# Altium PCB PCB_2020-03-10-03-30-57_2025-10-18.pcbdoc
Units mm, origin at the board's own origin, x right, y up, seen from the top; angles counter-clockwise.
Board outline 87.12 x 86.61 mm, 2 copper layers (Top Layer, Bottom Layer); 17 components, 30 nets, 115 pads, 0 vias.
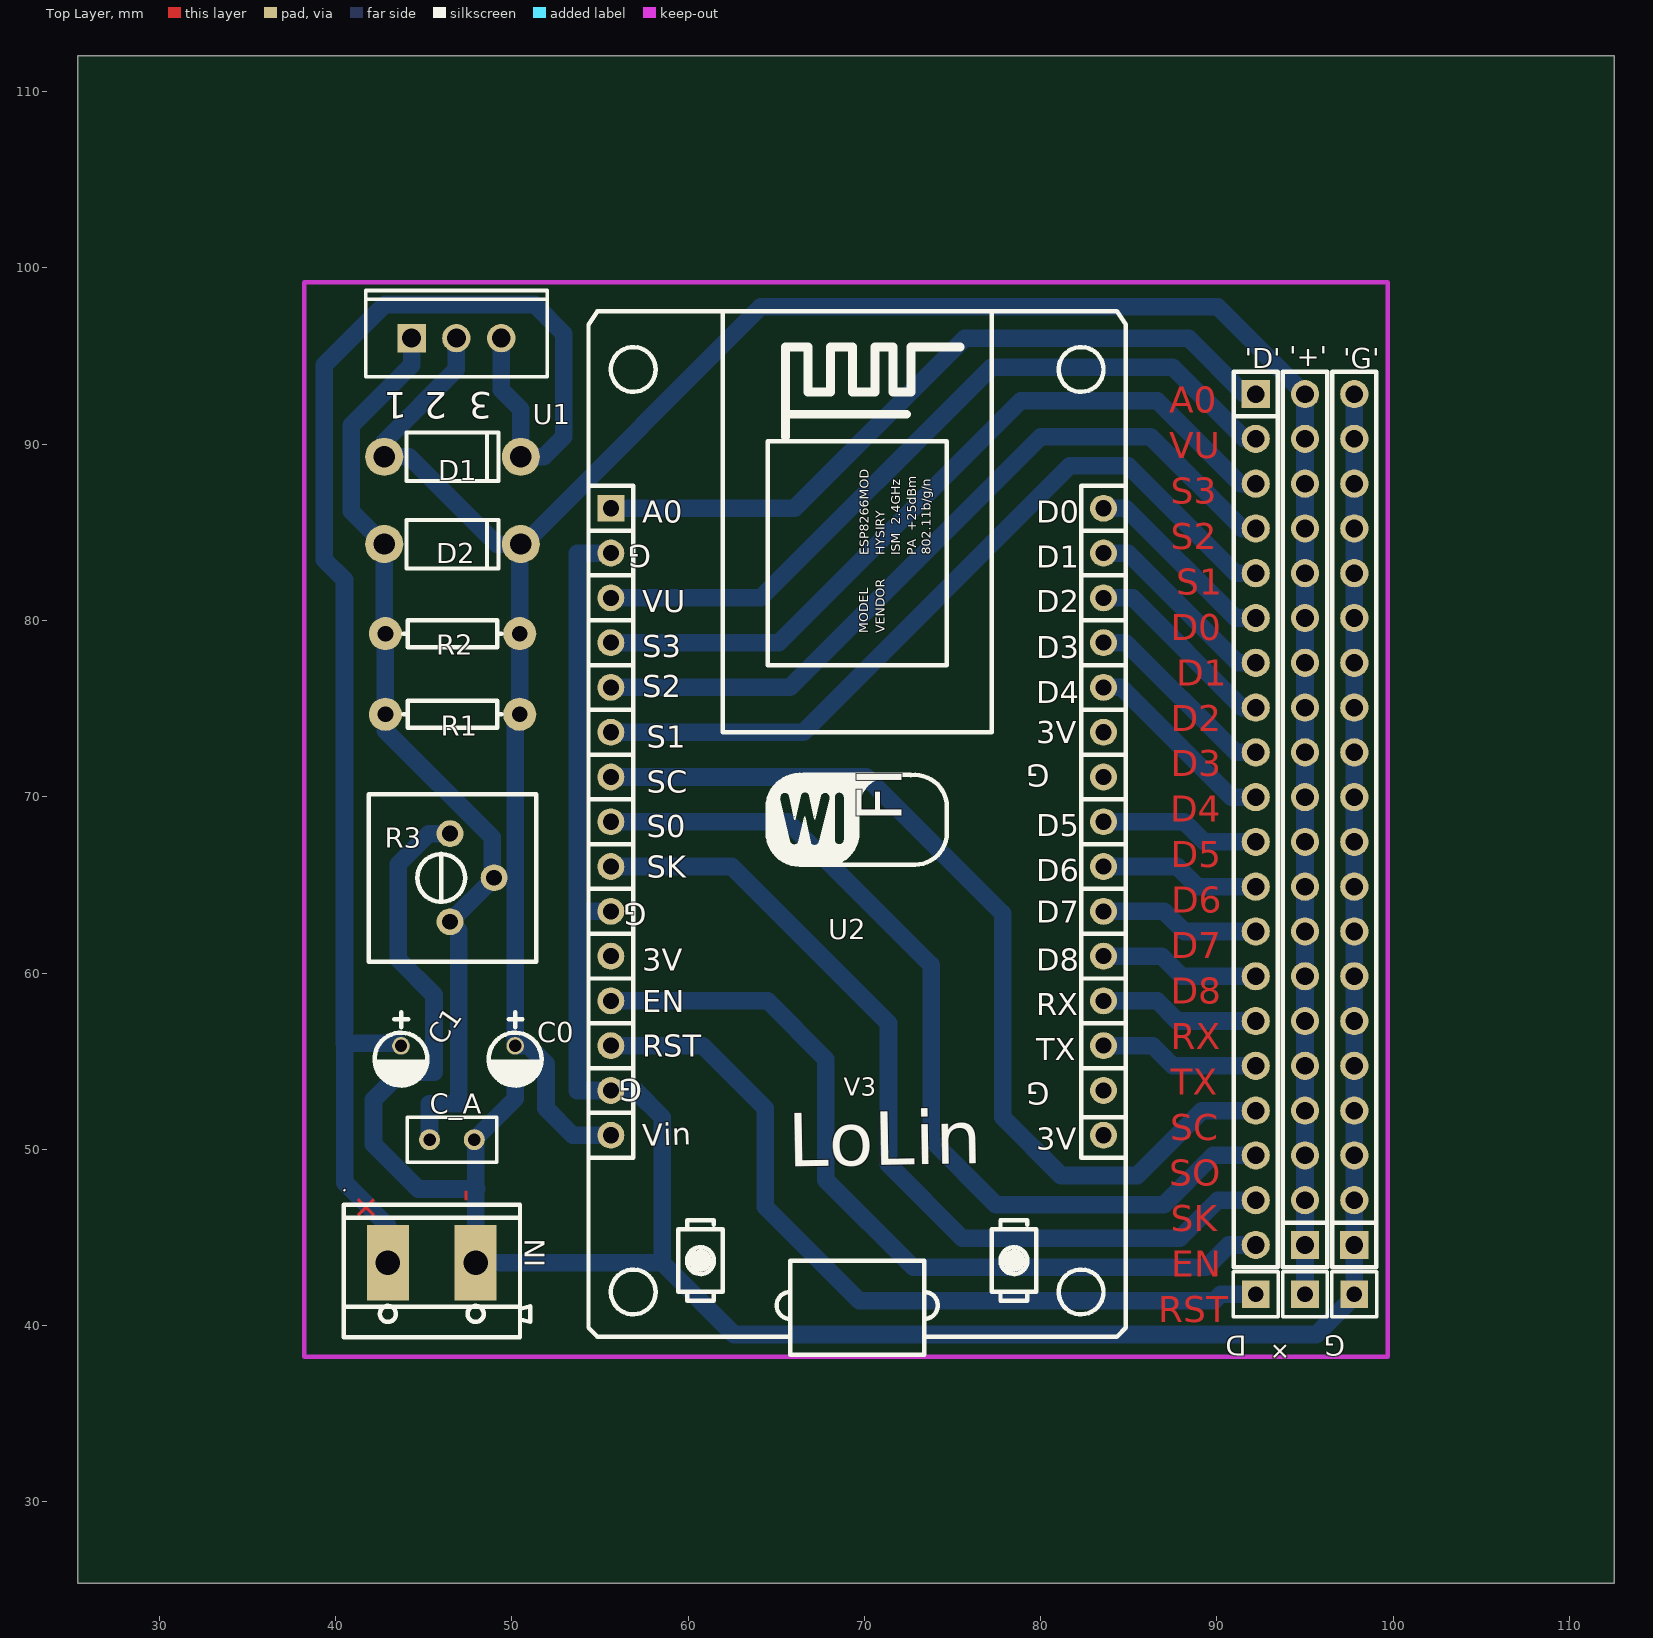
[diagram p0: Top Layer view]
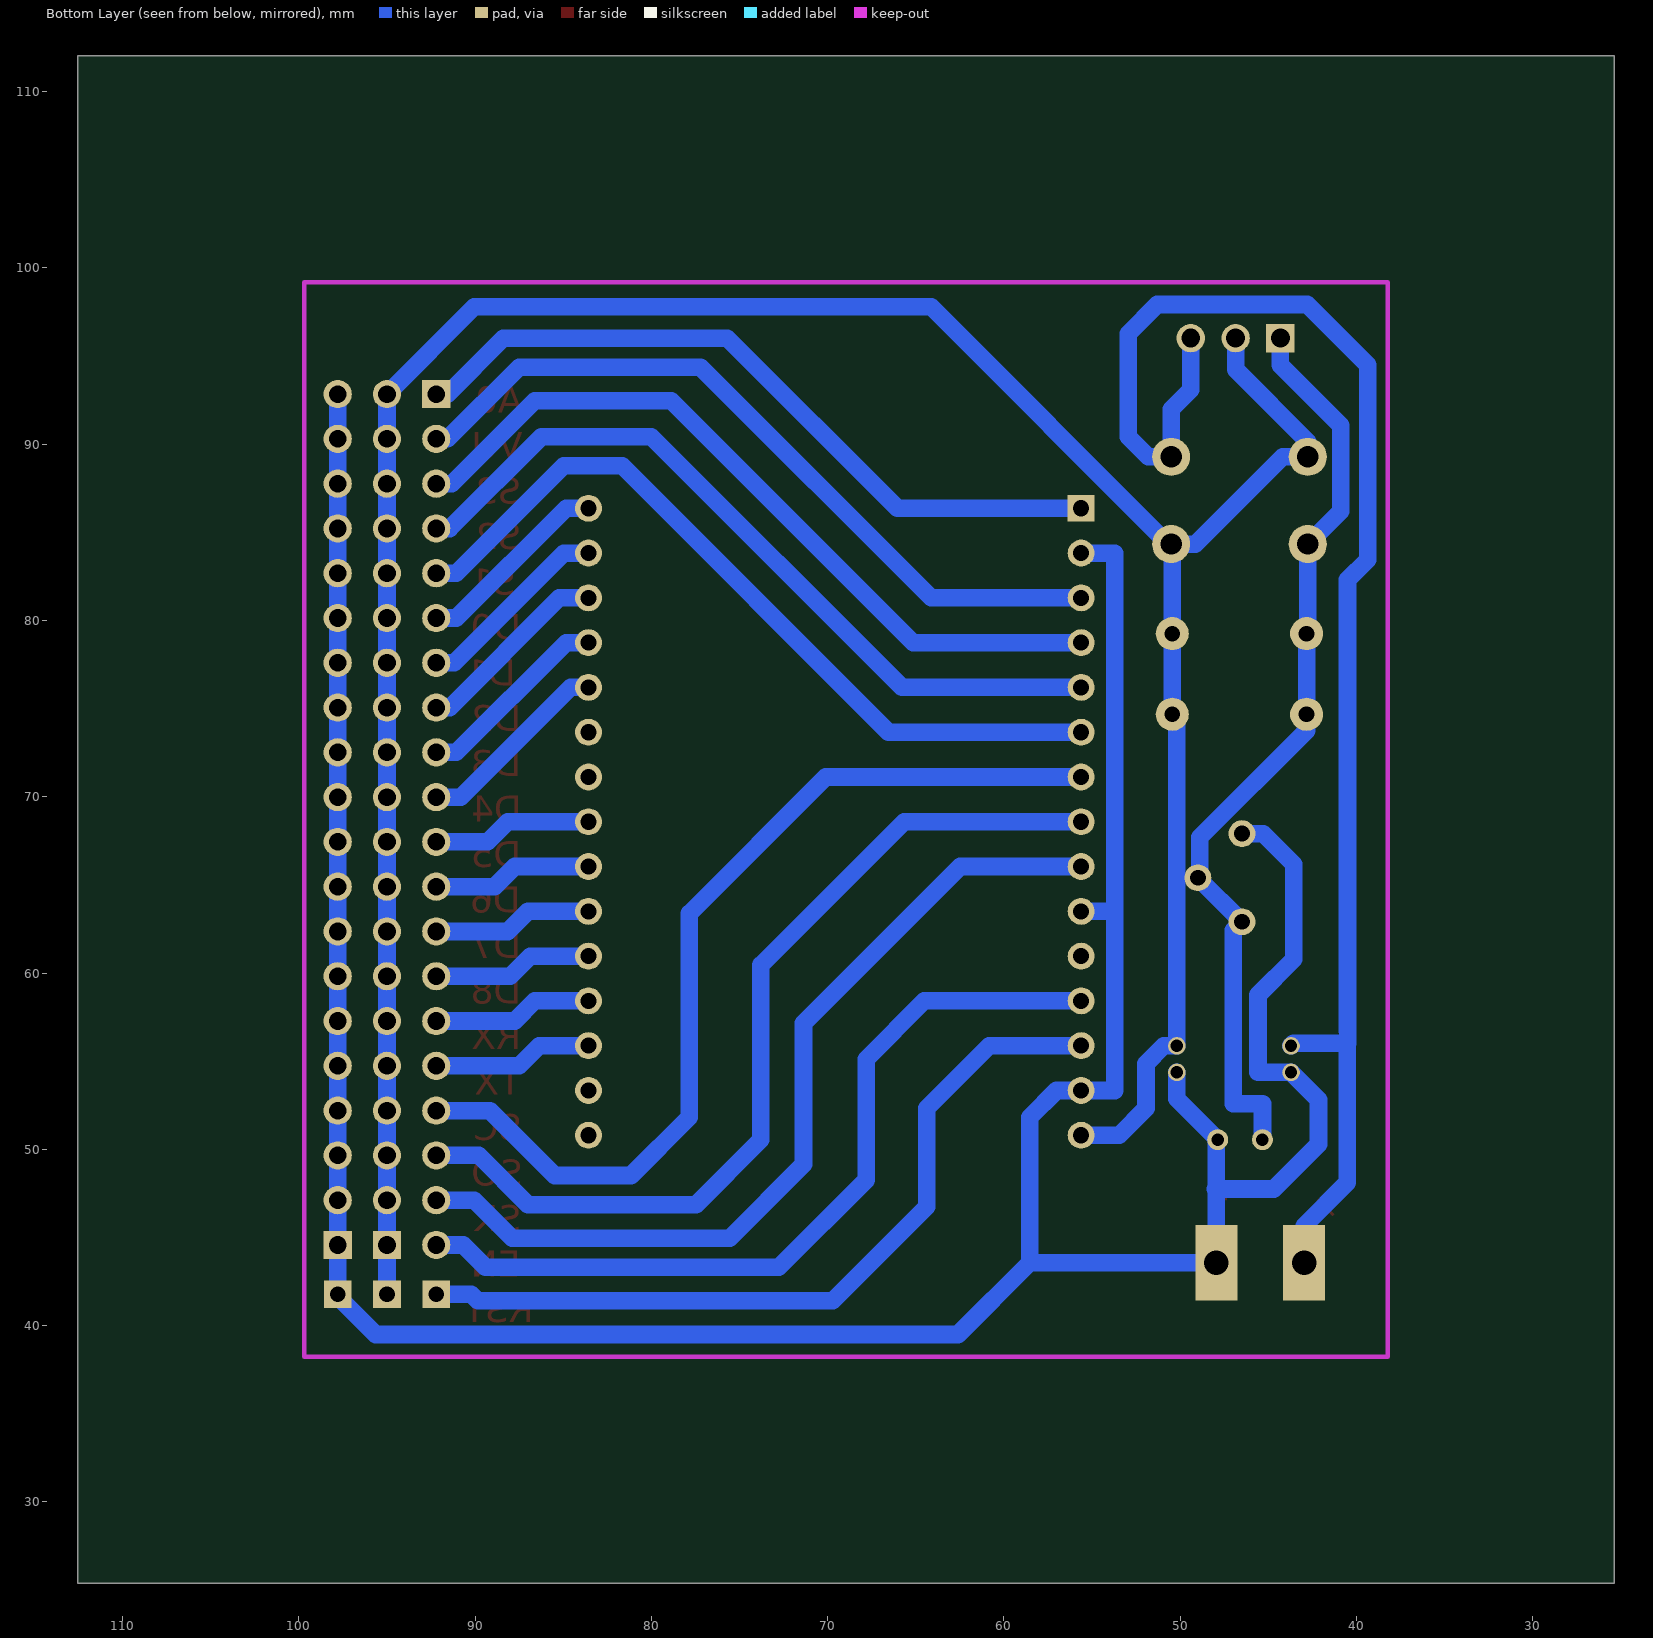
[diagram p1: Bottom Layer view, seen from below]

## Layer stack, top to bottom
Top Layer: signal copper (thickness not stored)
Dielectric: dielectric 0.32, FR-4, Dk 4.8
Bottom Layer: signal copper (thickness not stored)

## Board outline
112.522,25.4 25.4,25.4 25.4,112.014 112.522,112.014

## Components (designator, comment, footprint, x,y, rotation, side; value= is the part's Value field where it differs from the comment)
'+' "Header-Male-2.54_1x20" HDR-TH_20PIN-V-MALE-PITCH2.54 92.202,68.707 r270 top
'D' "Header-Male-2.54_1x20" HDR-TH_20PIN-V-MALE-PITCH2.54 94.996,68.707 r90 top
'G' "Header-Male-2.54_1x20" HDR-TH_20PIN-V-MALE-PITCH2.54 97.79,68.707 r90 top
+ "Header-Male-2.54_1x1" HDR-1X1/2.54 94.996,41.783 r0 top
C0 "1u" CAP-D3.0XF1.5 50.195,55.118 r0 top
C1 "0,1u" CAP-D3.0XF1.5 43.718,55.118 r0 top
C_A "1u" RAD-0.1 46.609,50.546 r0 top
D "Header-Male-2.54_1x1" HDR-1X1/2.54 92.202,41.783 r0 top
D1 "1N4002" DO-41 46.643,89.281 r0 top
D2 "1N4002" DO-41 46.643,84.328 r0 top
G "Header-Male-2.54_1x1" HDR-1X1/2.54 97.79,41.783 r0 top
IN "IN" TERMINAL_BLOCK_2P_5 45.466,43.561 r180 top
R1 "330" AXIAL-0.3 46.643,74.676 r0 top
R2 "1k" AXIAL-0.3 46.643,79.248 r0 top
R3 "100" RES-ADJ_3386P 47.752,65.405 r0 top
U1 "LM317MT" 221A-06 46.863,96.012 r270 top
U2 "ESP8266V3_LOLIN_V3" ESP8266.LOLIN_V3 69.596,68.58 r0 top

## Footprints (in the part's own frame and the unit in brackets; to place one, negate y for a bottom-side part, rotate by r counter-clockwise, add the part's x,y. Pads: shape width x height; smd on the part's side, far side on the other; paste and mask are expansions set on the pad)
221A-06 [mil]
  rect 63.5x63.5 hole 42 paste+0 mask+4: 1(0,-100)
  round 63.5 hole 42 paste+0 mask+4: 2(0,0) 3(0,100)
  silkscreen extent -106,-203 87,203
AXIAL-0.3 [mil]
  round 74 hole 35.4 paste+0 mask+4: 1(-150,0) 2(150,0)
  silkscreen extent -110,-30 110,30
CAP-D3.0XF1.5 [mm]
  round 1 hole 0.7 paste+0 mask+0.102: 1(0,0.751) 2(0,-0.751)
  silkscreen extent -1.5,-1.5 1.5,2.65
DO-41 [mil]
  round 85 hole 47.24 paste+0 mask+4: 1(-152.5,0) 2(152.5,0)
  silkscreen extent -102,-54 102,54
ESP8266.LOLIN_V3 [mil]
  rect 60x60 hole 36 paste+0 mask+4: 1(-550,700)
  round 60 hole 36 paste+0 mask+4: 2(-550,600) 3(-550,500) 4(-550,400) 5(-550,300) 6(-550,200) 7(-550,100) 8(-550,0) 9(-550,-100) 10(-550,-200) 11(-550,-300) 12(-550,-400) 13(-550,-500) 14(-550,-600) 15(-550,-700) 16(550,-700) 17(550,-600) 18(550,-500) 19(550,-400) 20(550,-300) 21(550,-200) 22(550,-100) 23(550,0) 24(550,100) 25(550,200) 26(550,300) 27(550,400) 28(550,500) 29(550,600) 30(550,700)
  silkscreen extent -600,-1190 600,1140
HDR-1X1/2.54 [mil]
  rect 62x62 hole 35 paste+0 mask+4: 1(0,0)
  silkscreen extent -50,-50 50,50
HDR-TH_20PIN-V-MALE-PITCH2.54 [mm]
  rect 1.6x1.6 hole 1 paste+0 mask+0.102: 1(-24.13,0)
  round 1.6 hole 1 paste+0 mask+0.102: 2(-21.59,0) 3(-19.05,0) 4(-16.51,0) 5(-13.97,0) 6(-11.43,0) 7(-8.89,0) 8(-6.35,0) 9(-3.81,0) 10(-1.27,0) 11(1.27,0) 12(3.81,0) 13(6.35,0) 14(8.89,0) 15(11.43,0) 16(13.97,0) 17(16.51,0) 18(19.05,0) 19(21.59,0) 20(24.13,0)
  silkscreen extent -25.4,-1.25 25.4,1.25
RAD-0.1 [mil]
  round 47 hole 28 paste+0 mask+4: 1(-50,0) 2(50,0)
  silkscreen extent -100,-50 100,50
RES-ADJ_3386P [mil]
  round 60 hole 35.43 paste+0 mask+4: 1(-49.21,-98.43) 2(49.21,-0.01) 3(-49.21,98.43)
  silkscreen extent -231,-188 143,186
TERMINAL_BLOCK_2P_5 [mm]
  rect 2.38x4.285 hole 1.402 paste+0 mask+0.102: 1(2.489,0) 2(-2.489,0)
  silkscreen extent -5.59,-3.3 5,4.22

## Nets (pads, with @x,y where several pads share a name; then routed paths per layer and width w, separated by ;. In a path a pad name is that pad's centre, name@x,y a point inside that pad or via, vN(x,y) a via of type N, cw(c..) or ccw(c..) an arc to the next point about the centre after c; other vN are vias at no path point)
A0: '+'.1 U2.1 | length 41.9
  Bottom Layer w1: U2.1 66.04,86.36 75.692,96.012 88.392,96.012 91.567,92.837 '+'.1
D0: '+'.6 U2.30 | length 11.2
  Bottom Layer w1: U2.30 84.836,86.36 91.059,80.137 '+'.6
D1: '+'.7 U2.29 | length 11.2
  Bottom Layer w1: U2.29 84.963,83.82 91.186,77.597 '+'.7
D2: '+'.8 U2.28 | length 11.2
  Bottom Layer w1: U2.28 85.217,81.28 91.44,75.057 '+'.8
D3: '+'.9 U2.27 | length 11.2
  Bottom Layer w1: U2.27 84.836,78.74 91.059,72.517 '+'.9
D4: '+'.10 U2.26 | length 11.2
  Bottom Layer w1: U2.26 84.582,76.2 90.805,69.977 '+'.10
D5: '+'.11 U2.23 | length 9.1
  Bottom Layer w1: U2.23 88.138,68.58 89.281,67.437 '+'.11
D6: '+'.12 U2.22 | length 9.1
  Bottom Layer w1: U2.22 87.757,66.04 88.9,64.897 '+'.12
D7: '+'.13 U2.21 | length 9.1
  Bottom Layer w1: U2.21 86.995,63.5 88.138,62.357 '+'.13
D8: '+'.14 U2.20 | length 9.1
  Bottom Layer w1: U2.20 86.868,60.96 88.011,59.817 '+'.14
EN: '+'.20 U2.12 | length 47.4
  Bottom Layer w1: U2.12 64.516,58.42 67.818,55.118 67.818,48.26 72.771,43.307 89.408,43.307 90.678,44.577 '+'.20
GND: 'G'.1 'G'.2 'G'.3 'G'.4 'G'.5 'G'.6 'G'.7 'G'.8 'G'.9 'G'.10 'G'.11 'G'.12 'G'.13 'G'.14 'G'.15 'G'.16 'G'.17 'G'.18 'G'.19 'G'.20 C0.2 C1.2 C_A.2 G.1 IN.2 R3.3 U2.2 U2.10 U2.14 | length 193.2
  Bottom Layer w1: R3.3 45.298,67.904 43.561,66.167 43.561,60.785 45.593,58.753 45.593,54.366 C1.2 42.164,52.812 42.164,50.292 44.704,47.752 48.006,47.752 ; C0.2 50.195,52.862 C_A.2 47.955,50.47 IN.2 58.547,43.561 ; U2.10 53.721,63.5 ; U2.2 53.721,83.82 53.721,63.5 ; 'G'.20 97.79,41.656 95.631,39.497 62.611,39.497 58.547,43.561 ; 53.721,63.5 53.721,53.34 U2.14 57.023,53.34 58.547,51.816 58.547,43.561
R2_1: C_A.1 D2.1 R1.1 R2.1 R3.1 R3.2 U1.1 | length 53.1
  Bottom Layer w1: D2.1 40.894,86.203 40.894,91.059 44.323,94.488 U1.1 ; D2.1 42.769,79.312 R2.1 R1.1 ; R1.1 42.832,73.754 48.895,67.691 48.895,65.512 R3.2 R3.1 46.99,62.418 46.99,52.578 45.339,52.578 C_A.1
RST: D.1 U2.13 | length 46
  Bottom Layer w1: U2.13 60.833,55.88 64.389,52.324 64.389,46.736 69.723,41.402 89.837,41.402 90.218,41.783 D.1
RX: '+'.15 U2.19 | length 9.1
  Bottom Layer w1: U2.19 86.614,58.42 87.757,57.277 '+'.15
S0: '+'.18 U2.8 | length 52.5
  Bottom Layer w1: U2.8 65.659,68.58 73.787,60.452 73.787,50.546 77.47,46.863 86.995,46.863 89.789,49.657 '+'.18
S1: '+'.5 U2.6 | length 45.4
  Bottom Layer w1: U2.6 66.548,73.66 81.661,88.773 84.963,88.773 91.059,82.677 '+'.5
S2: '+'.4 U2.5 | length 44.6
  Bottom Layer w1: U2.5 65.786,76.2 80.01,90.424 86.233,90.424 91.44,85.217 '+'.4
S3: '+'.3 U2.4 | length 44.2
  Bottom Layer w1: U2.4 65.151,78.74 78.867,92.456 86.614,92.456 91.313,87.757 '+'.3
SC: '+'.17 U2.7 | length 54.2
  Bottom Layer w1: U2.7 70.104,71.12 77.851,63.373 77.851,51.816 81.153,48.514 85.471,48.514 89.154,52.197 '+'.17
SK: '+'.19 U2.9 | length 50.9
  Bottom Layer w1: U2.9 62.484,66.04 71.374,57.15 71.374,49.149 75.565,44.958 87.884,44.958 90.043,47.117 '+'.19
TX: '+'.16 U2.18 | length 9.1
  Bottom Layer w1: U2.18 86.36,55.88 87.503,54.737 '+'.16
U2_11: U2.11
U2_16: U2.16
U2_17: U2.17
U2_24: U2.24
U2_25: U2.25
VIN: C1.1 D1.2 IN.1 U1.3 | length 87.3
  Bottom Layer w1: 40.506,56.007 40.513,57.15 40.513,82.304 39.37,83.447 39.37,94.488 42.799,97.917 51.308,97.917 52.959,96.266 52.959,90.424 51.816,89.281 D1.2 50.516,91.978 49.403,93.091 U1.3 ; 40.513,56.007 43.581,56.007 C1.1 ; 40.526,56.007 40.526,48.12 42.977,45.669 IN.1
VOUT: 'D'.1 'D'.2 'D'.3 'D'.4 'D'.5 'D'.6 'D'.7 'D'.8 'D'.9 'D'.10 'D'.11 'D'.12 'D'.13 'D'.14 'D'.15 'D'.16 'D'.17 'D'.18 'D'.19 'D'.20 +.1 C0.1 D1.1 D2.2 R1.2 R2.2 U1.2 U2.15 | length 159.5
  Bottom Layer w1: U1.2 46.863,94.234 42.769,90.14 D1.1 44.196,89.281 49.149,84.328 D2.2 50.673,84.328 64.135,97.79 90.043,97.79 'D'.20 +.1 ; R1.2 50.195,74.933 C0.1 50.937,55.87 51.943,54.864 51.943,52.324 53.467,50.8 U2.15 ; R1.2 R2.2 50.453,84.265 D2.2
VU: '+'.2 U2.3 | length 43.7
  Bottom Layer w1: U2.3 64.135,81.28 77.216,94.361 87.503,94.361 91.567,90.297 '+'.2

## Other copper
Top Layer:
  text "A0" at 87.309,91.775 h1.5
  text "VU" at 87.309,89.196 h1.5
  text "S3" at 87.376,86.618 h1.5
  text "S2" at 87.376,84.04 h1.5
  text "S1" at 87.683,81.461 h1.5
  text "D0" at 87.376,78.883 h1.5
  text "D1" at 87.683,76.304 h1.5
  text "D2" at 87.376,73.726 h1.5
  text "D3" at 87.376,71.147 h1.5
  text "D4" at 87.342,68.569 h1.5
  text "D5" at 87.376,65.99 h1.5
  text "D6" at 87.41,63.412 h1.5
  text "D7" at 87.376,60.833 h1.5
  text "D8" at 87.376,58.255 h1.5
  text "RX" at 87.376,55.676 h1.5
  text "TX" at 87.376,53.098 h1.5
  text "SC" at 87.342,50.52 h1.5
  text "SO" at 87.309,47.941 h1.5
  text "+" at 41.888,47.774 h1.5 r225
  text "-" at 47.994,46.99 h1.5 r90
  text "SK" at 87.376,45.363 h1.5
  text "EN" at 87.41,42.784 h1.5
  text "RST" at 86.674,40.206 h1.5

## Text inside footprints (layer, text, board x,y; h text height)
U1: Top Overlay "1" at 44.069,92.953 h1.5 r180; Top Overlay "2" at 46.355,92.953 h1.5 r180; Top Overlay "3" at 48.895,92.953 h1.5 r180
U2: Top Overlay "LoLin" at 65.686,49.022 h3.05 r1; Top Overlay "V3" at 68.834,53.04 h1.02; Top Overlay "A0" at 57.404,85.54 h1.27; Top Overlay "G" at 57.912,84.27 h1.27 r180; Top Overlay "VU" at 57.404,80.46 h1.27; Top Overlay "S3" at 57.404,77.92 h1.27; Top Overlay "S2" at 57.404,75.634 h1.27; Top Overlay "S1" at 57.658,72.771 h1.27; Top Overlay "SC" at 57.658,70.231 h1.27; Top Overlay "S0" at 57.658,67.691 h1.27; Top Overlay "SK" at 57.658,65.405 h1.27; Top Overlay "G" at 57.658,63.95 h1.27 r180; Top Overlay "3V" at 57.404,60.14 h1.27; Top Overlay "EN" at 57.404,57.785 h1.27; Top Overlay "RST" at 57.404,55.245 h1.27; Top Overlay "G" at 57.404,53.975 h1.27 r180; Top Overlay "Vin" at 57.426,50.165 h1.27 r2; Top Overlay "3V" at 79.756,49.98 h1.27; Top Overlay "G" at 80.518,53.79 h1.27 r180; Top Overlay "TX" at 79.756,55.06 h1.27; Top Overlay "RX" at 79.756,57.6 h1.27; Top Overlay "D8" at 79.756,60.14 h1.27; Top Overlay "D7" at 79.756,62.865 h1.27; Top Overlay "D6" at 79.756,65.22 h1.27; Top Overlay "D5" at 79.756,67.76 h1.27; Top Overlay "G" at 80.518,71.824 h1.27 r180; Top Overlay "3V" at 79.756,73.025 h1.27; Top Overlay "D4" at 79.756,75.311 h1.27; Top Overlay "D3" at 79.756,77.851 h1.27; Top Overlay "D2" at 79.756,80.46 h1.27; Top Overlay "D1" at 79.756,83 h1.27; Top Overlay "D0" at 79.756,85.54 h1.27; Top Overlay "FI" at 72.136,68.58 h2.54 r90; Top Overlay "MODEL" at 70.236,79.284 h0.51 r90; Top Overlay "VENDOR" at 71.161,79.284 h0.51 r90; Top Overlay "ESP8266MOD" at 70.246,83.703 h0.51 r90; Top Overlay "HYSIRY" at 71.171,83.703 h0.51 r90; Top Overlay "ISM  2.4GHz" at 72.024,83.703 h0.51 r90; Top Overlay "PA  +25dBm" at 72.949,83.703 h0.51 r90; Top Overlay "802.11b/g/n" at 73.774,83.729 h0.51 r90